# EAGLE board FinalDigitalSynthType5Multi (EAGLE 5.10)
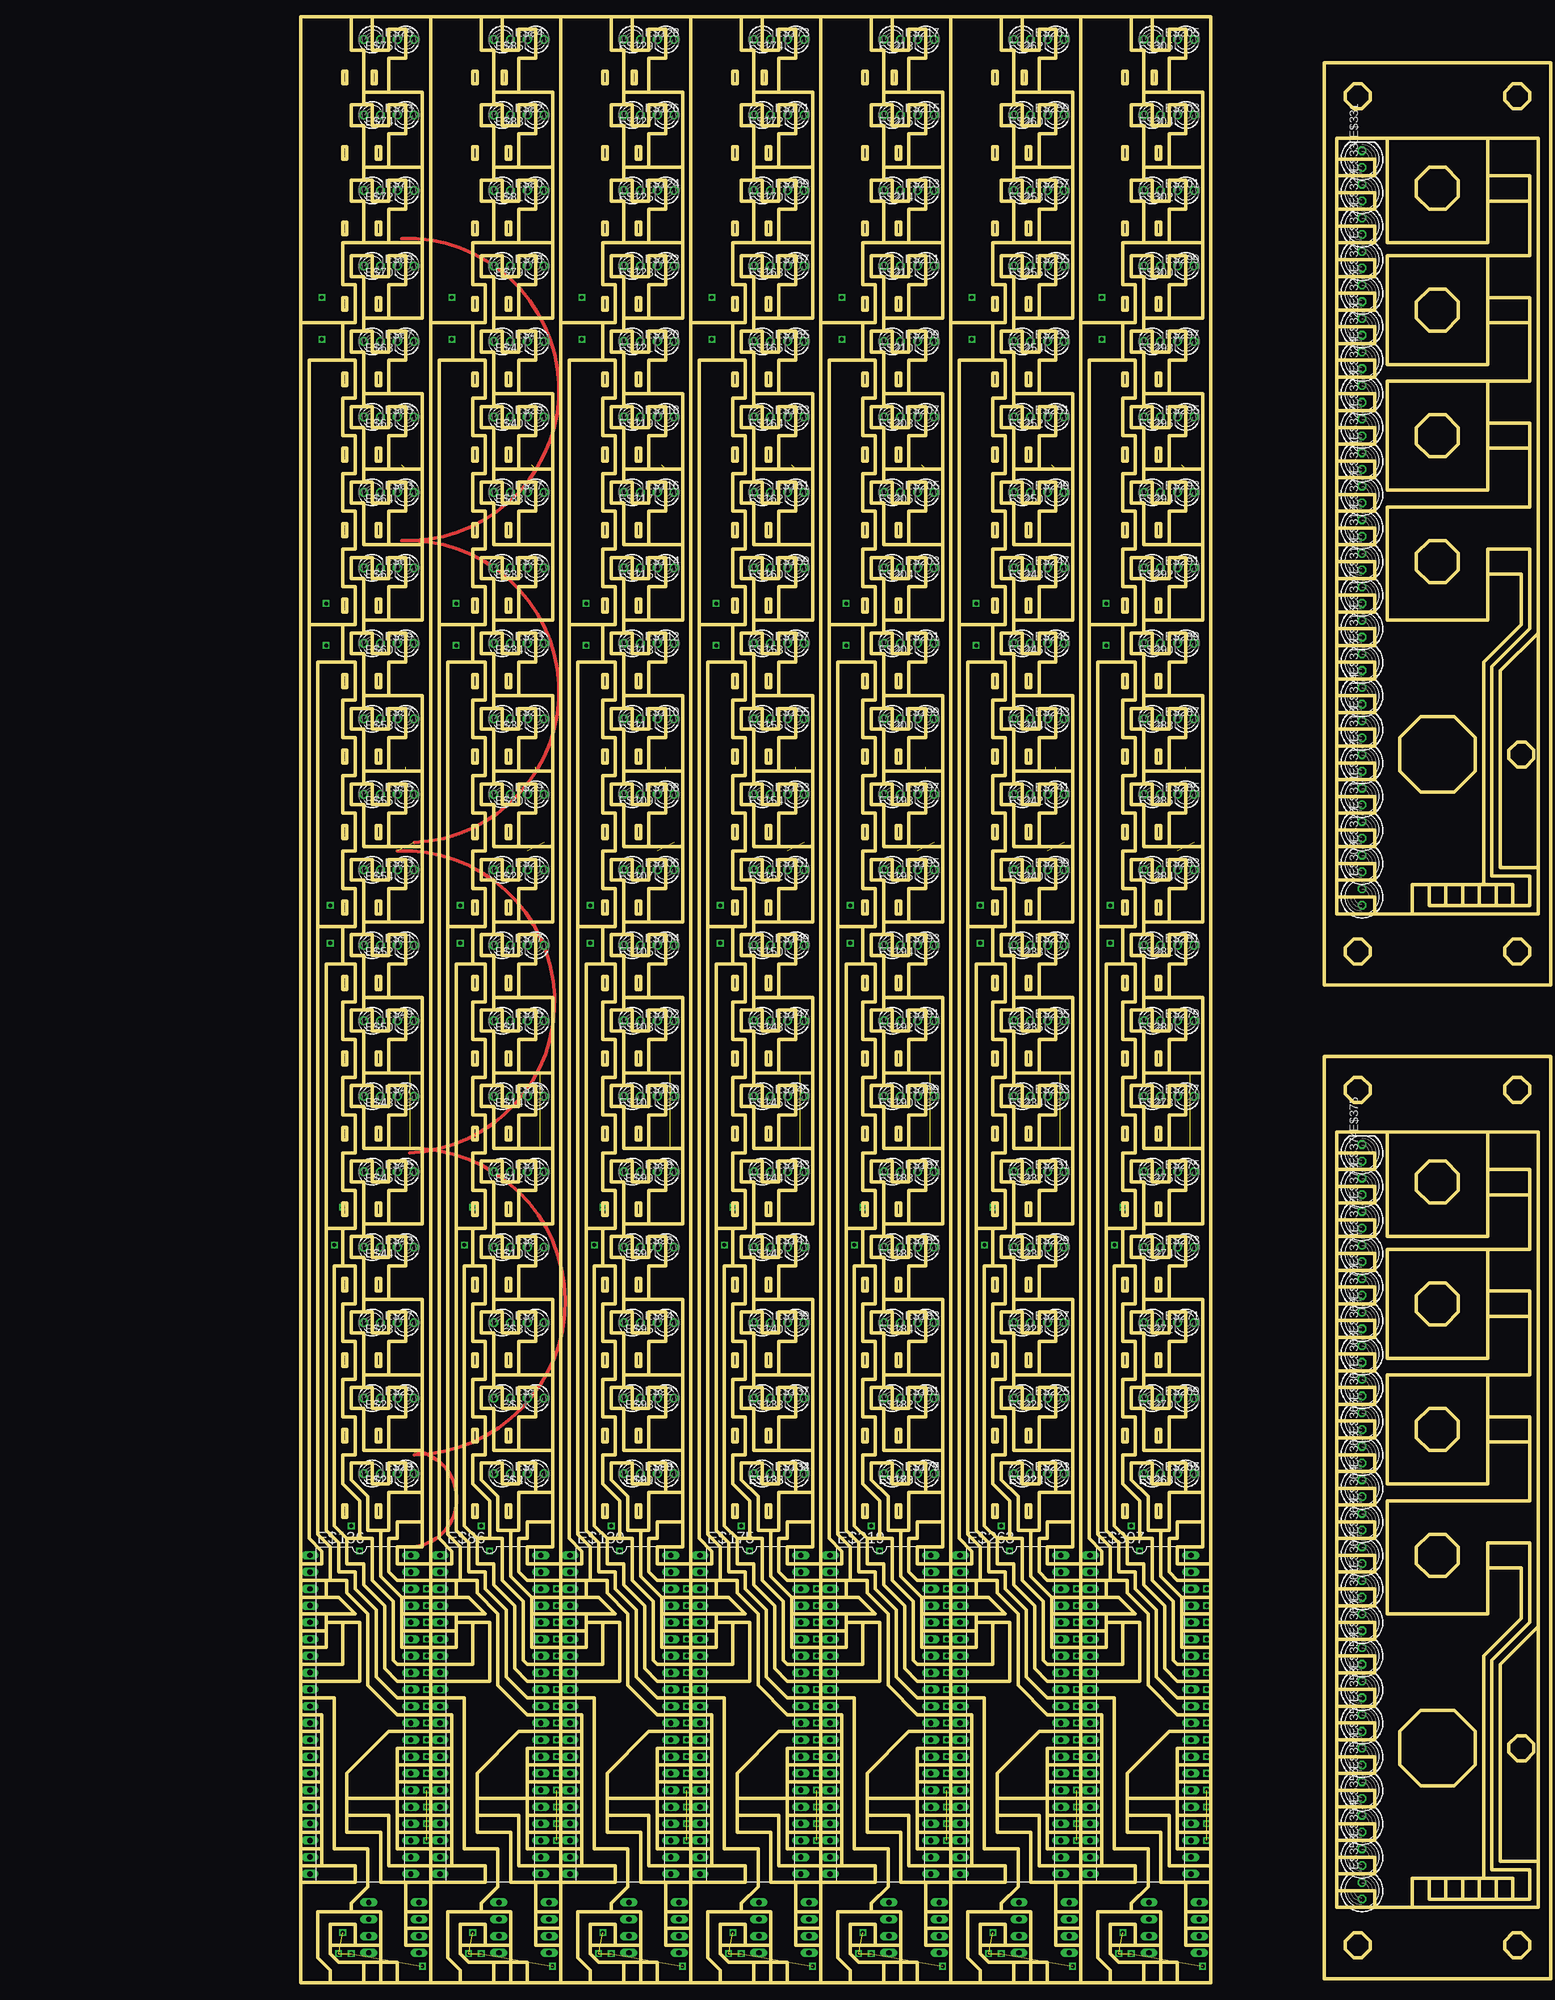
[diagram p0: board, top side]
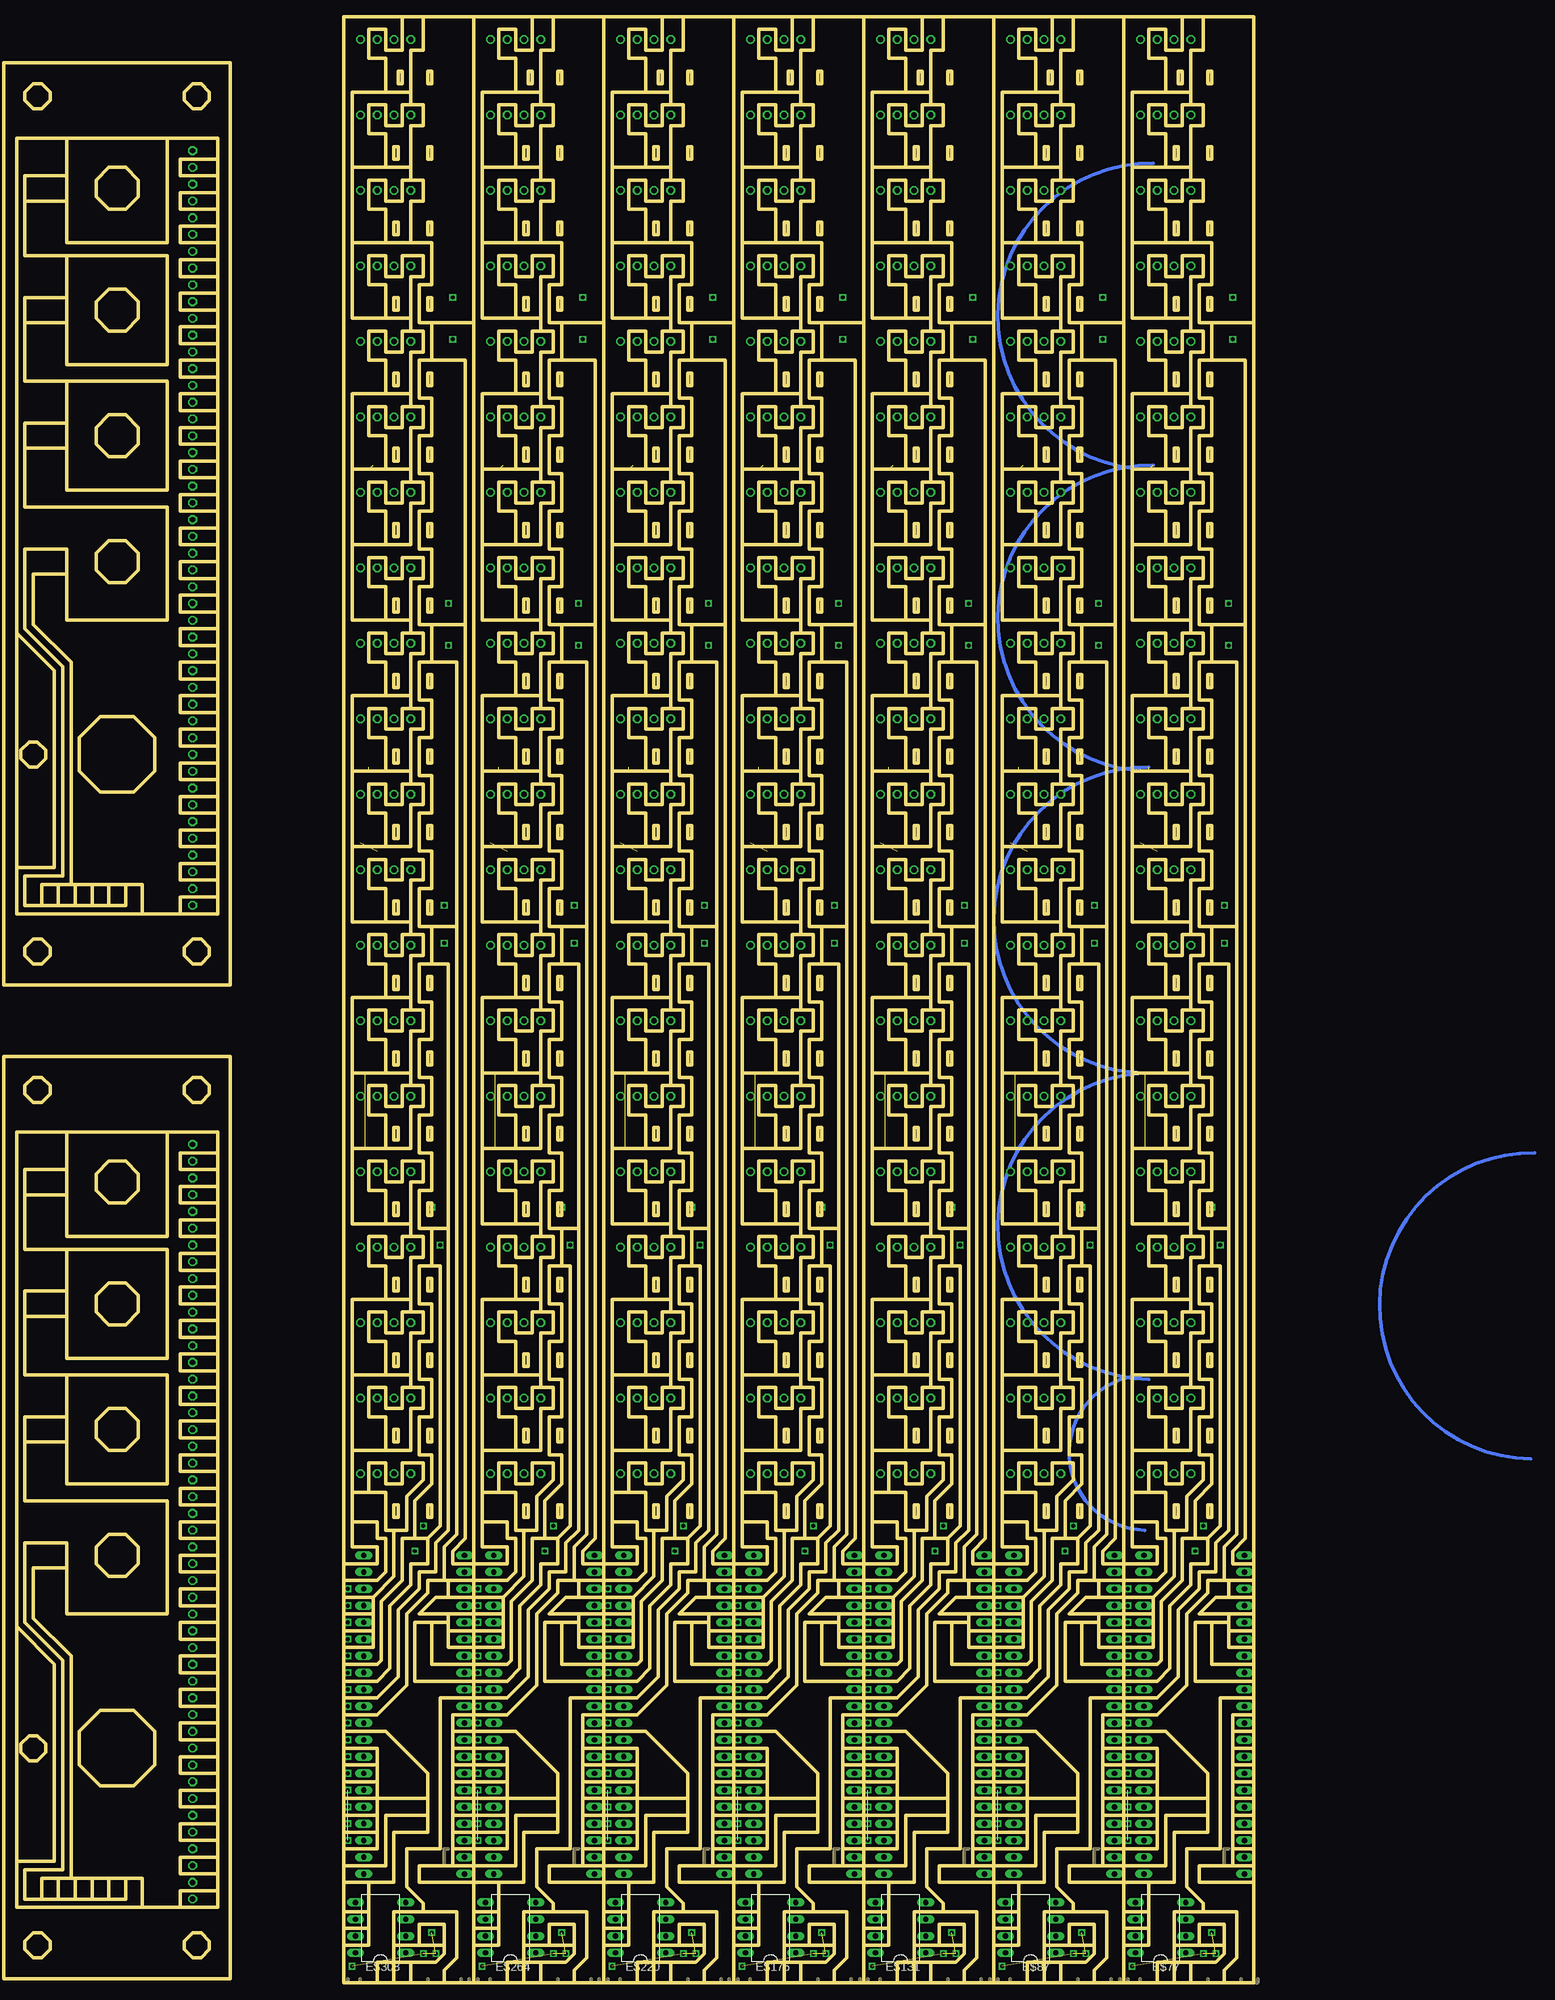
[diagram p1: board, bottom side, seen from below]

Size 187.33 x 297.81 mm. Coordinates in mm from the lower left corner, seen from the top.
Outline: 4317 segments
Copper layers (1*16): Top 0.035mm / dielectric 1.5mm / Bottom 0.035mm
Design rules "default": minimum track width 10mil, minimum drill 24mil, track to track 8mil, track to pad 8mil, pad to pad 8mil, via to via 8mil, smd to smd 8mil, copper to edge 40mil, drill to drill 8mil, minimum pad ring 10mil, minimum via ring 8mil, stop-mask expansion 4mil, vias tented up to drill 0mil, thermal gap 10mil
Milling: 1288 lines

## Footprints (pad centres in the part's own frame; a part is rotated, then mirrored left to right if it is on the bottom)
LED3MM = drill 0.813 octagon: A -1.27,0; K 1.27,0
DIL08 = drill 0.813 long: 1 -3.81,-3.81; 2 -1.27,-3.81; 3 1.27,-3.81; 4 3.81,-3.81; 5 3.81,3.81; 6 1.27,3.81; 7 -1.27,3.81; 8 -3.81,3.81
DIL40 = drill 0.813 long: 1 -24.13,-7.62; 2 -21.59,-7.62; 3 -19.05,-7.62; 4 -16.51,-7.62; 5 -13.97,-7.62; 6 -11.43,-7.62; 7 -8.89,-7.62; 8 -6.35,-7.62; 9 -3.81,-7.62; 10 -1.27,-7.62; 11 1.27,-7.62; 12 3.81,-7.62; 13 6.35,-7.62; 14 8.89,-7.62; 15 11.43,-7.62; 16 13.97,-7.62; 17 16.51,-7.62; 18 19.05,-7.62; 19 21.59,-7.62; 20 24.13,-7.62; 21 24.13,7.62; 22 21.59,7.62; 23 19.05,7.62; 24 16.51,7.62; 25 13.97,7.62; 26 11.43,7.62; 27 8.89,7.62; 28 6.35,7.62; 29 3.81,7.62; 30 1.27,7.62; 31 -1.27,7.62; 32 -3.81,7.62; 33 -6.35,7.62; 34 -8.89,7.62; 35 -11.43,7.62; 36 -13.97,7.62; 37 -16.51,7.62; 38 -19.05,7.62; 39 -21.59,7.62; 40 -24.13,7.62
LED5MM = drill 0.813 octagon: A -1.27,0; K 1.27,0

## Placement (x,y rotation side)
E$1  [LED3MM]  30.48,77.15 0 top
E$2  [LED3MM]  35.56,77.15 180 top
E$3  [LED3MM]  30.48,77.15 0 top
E$4  [LED3MM]  35.56,77.15 180 top
E$5  [LED3MM]  30.48,88.58 0 top
E$6  [LED3MM]  35.56,88.58 180 top
E$7  [LED3MM]  30.48,100.01 0 top
E$8  [LED3MM]  35.56,100.01 180 top
E$9  [LED3MM]  30.48,111.44 0 top
E$10  [LED3MM]  35.56,111.44 180 top
E$11  [LED3MM]  30.48,122.87 0 top
E$12  [LED3MM]  35.56,122.87 180 top
E$13  [LED3MM]  30.48,134.3 0 top
E$14  [LED3MM]  35.56,134.3 180 top
E$15  [LED3MM]  30.48,145.73 0 top
E$16  [LED3MM]  35.56,145.73 180 top
E$17  [LED3MM]  30.48,157.16 0 top
E$18  [LED3MM]  35.56,157.16 180 top
E$19  [LED3MM]  10.79,77.15 0 top
E$20  [LED3MM]  15.88,77.15 180 top
E$21  [LED3MM]  30.48,168.59 0 top
E$22  [LED3MM]  35.56,168.59 180 top
E$23  [LED3MM]  10.79,77.15 0 top
E$24  [LED3MM]  15.88,77.15 180 top
E$25  [LED3MM]  10.79,88.58 0 top
E$26  [LED3MM]  15.88,88.58 180 top
E$27  [LED3MM]  10.79,100.01 0 top
E$28  [LED3MM]  15.88,100.01 180 top
E$29  [LED3MM]  30.48,180.02 0 top
E$30  [LED3MM]  35.56,180.02 180 top
E$31  [LED3MM]  30.48,191.45 0 top
E$32  [LED3MM]  35.56,191.45 180 top
E$33  [LED3MM]  30.48,202.88 0 top
E$34  [LED3MM]  35.56,202.88 180 top
E$35  [LED3MM]  30.48,214.31 0 top
E$36  [LED3MM]  35.56,214.31 180 top
E$37  [LED3MM]  30.48,225.74 0 top
E$38  [LED3MM]  35.56,225.74 180 top
E$39  [LED3MM]  30.48,237.17 0 top
E$40  [LED3MM]  35.56,237.17 180 top
E$41  [LED3MM]  30.48,248.6 0 top
E$42  [LED3MM]  35.56,248.6 180 top
E$43  [LED3MM]  10.79,111.44 0 top
E$44  [LED3MM]  15.88,111.44 180 top
E$45  [LED3MM]  10.79,122.87 0 top
E$46  [LED3MM]  15.88,122.87 180 top
E$47  [LED3MM]  10.79,134.3 0 top
E$48  [LED3MM]  15.88,134.3 180 top
E$49  [LED3MM]  10.79,145.73 0 top
E$50  [LED3MM]  15.88,145.73 180 top
E$51  [LED3MM]  10.79,157.16 0 top
E$52  [LED3MM]  15.88,157.16 180 top
E$53  [LED3MM]  10.79,168.59 0 top
E$54  [LED3MM]  15.88,168.59 180 top
E$55  [LED3MM]  10.79,180.02 0 top
E$56  [LED3MM]  15.88,180.02 180 top
E$57  [LED3MM]  10.79,191.45 0 top
E$58  [LED3MM]  15.88,191.45 180 top
E$59  [LED3MM]  10.79,202.88 0 top
E$60  [LED3MM]  15.88,202.88 180 top
E$61  [LED3MM]  10.79,214.31 0 top
E$62  [LED3MM]  15.88,214.31 180 top
E$63  [LED3MM]  10.79,225.74 0 top
E$64  [LED3MM]  15.88,225.74 180 top
E$65  [LED3MM]  10.79,237.17 0 top
E$66  [LED3MM]  15.88,237.17 180 top
E$67  [LED3MM]  10.79,248.6 0 top
E$68  [LED3MM]  15.88,248.6 180 top
E$69  [LED3MM]  10.79,260.03 0 top
E$70  [LED3MM]  15.88,260.03 180 top
E$71  [LED3MM]  10.79,271.46 0 top
E$72  [LED3MM]  15.88,271.46 180 top
E$73  [LED3MM]  10.79,282.89 0 top
E$74  [LED3MM]  15.88,282.89 180 top
E$75  [LED3MM]  10.79,294.32 0 top
E$76  [LED3MM]  15.88,294.32 180 top
E$77  [DIL08]  14.1,8.38 90 bottom
E$78  [LED3MM]  30.48,260.03 0 top
E$79  [LED3MM]  35.56,260.03 180 top
E$80  [LED3MM]  30.48,271.46 0 top
E$81  [LED3MM]  35.56,271.46 180 top
E$82  [LED3MM]  30.48,282.89 0 top
E$83  [LED3MM]  35.56,282.89 180 top
E$84  [LED3MM]  30.48,294.32 0 top
E$85  [LED3MM]  35.56,294.32 180 top
E$86  [DIL40]  28.7,40.64 270 top
E$87  [DIL08]  33.78,8.38 90 bottom
E$88  [LED3MM]  50.16,77.15 0 top
E$89  [LED3MM]  55.25,77.15 180 top
E$90  [LED3MM]  50.16,77.15 0 top
E$91  [LED3MM]  55.25,77.15 180 top
E$92  [LED3MM]  50.16,88.58 0 top
E$93  [LED3MM]  55.25,88.58 180 top
E$94  [LED3MM]  50.16,100.01 0 top
E$95  [LED3MM]  55.25,100.01 180 top
E$96  [LED3MM]  50.16,111.44 0 top
E$97  [LED3MM]  55.25,111.44 180 top
E$98  [LED3MM]  50.16,122.87 0 top
E$99  [LED3MM]  55.25,122.87 180 top
E$100  [LED3MM]  50.16,134.3 0 top
E$101  [LED3MM]  55.25,134.3 180 top
E$102  [LED3MM]  50.16,145.73 0 top
E$103  [LED3MM]  55.25,145.73 180 top
E$104  [LED3MM]  50.16,157.16 0 top
E$105  [LED3MM]  55.25,157.16 180 top
E$106  [LED3MM]  50.16,168.59 0 top
E$107  [LED3MM]  55.25,168.59 180 top
E$108  [LED3MM]  50.16,180.02 0 top
E$109  [LED3MM]  55.25,180.02 180 top
E$110  [LED3MM]  50.16,191.45 0 top
E$111  [LED3MM]  55.25,191.45 180 top
E$112  [LED3MM]  50.16,202.88 0 top
E$113  [LED3MM]  55.25,202.88 180 top
E$114  [LED3MM]  50.16,214.31 0 top
E$115  [LED3MM]  55.25,214.31 180 top
E$116  [LED3MM]  50.16,225.74 0 top
E$117  [LED3MM]  55.25,225.74 180 top
E$118  [LED3MM]  50.16,237.17 0 top
E$119  [LED3MM]  55.25,237.17 180 top
E$120  [LED3MM]  50.16,248.6 0 top
E$121  [LED3MM]  55.25,248.6 180 top
E$122  [LED3MM]  50.16,260.03 0 top
E$123  [LED3MM]  55.25,260.03 180 top
E$124  [LED3MM]  50.16,271.46 0 top
E$125  [LED3MM]  55.25,271.46 180 top
E$126  [LED3MM]  50.16,282.89 0 top
E$127  [LED3MM]  55.25,282.89 180 top
E$128  [LED3MM]  50.16,294.32 0 top
E$129  [LED3MM]  55.25,294.32 180 top
E$130  [DIL40]  48.39,40.64 270 top
E$131  [DIL08]  53.47,8.38 90 bottom
E$132  [LED3MM]  69.85,77.15 0 top
E$133  [LED3MM]  74.93,77.15 180 top
E$134  [LED3MM]  69.85,77.15 0 top
E$135  [LED3MM]  74.93,77.15 180 top
E$136  [DIL40]  9.02,40.64 270 top
E$137  [LED3MM]  69.85,88.58 0 top
E$138  [LED3MM]  74.93,88.58 180 top
E$139  [LED3MM]  69.85,100.01 0 top
E$140  [LED3MM]  74.93,100.01 180 top
E$141  [LED3MM]  69.85,111.44 0 top
E$142  [LED3MM]  74.93,111.44 180 top
E$143  [LED3MM]  69.85,122.87 0 top
E$144  [LED3MM]  74.93,122.87 180 top
E$145  [LED3MM]  69.85,134.3 0 top
E$146  [LED3MM]  74.93,134.3 180 top
E$147  [LED3MM]  69.85,145.73 0 top
E$148  [LED3MM]  74.93,145.73 180 top
E$149  [LED3MM]  69.85,157.16 0 top
E$150  [LED3MM]  74.93,157.16 180 top
E$151  [LED3MM]  69.85,168.59 0 top
E$152  [LED3MM]  74.93,168.59 180 top
E$153  [LED3MM]  69.85,180.02 0 top
E$154  [LED3MM]  74.93,180.02 180 top
E$155  [LED3MM]  69.85,191.45 0 top
E$156  [LED3MM]  74.93,191.45 180 top
E$157  [LED3MM]  69.85,202.88 0 top
E$158  [LED3MM]  74.93,202.88 180 top
E$159  [LED3MM]  69.85,214.31 0 top
E$160  [LED3MM]  74.93,214.31 180 top
E$161  [LED3MM]  69.85,225.74 0 top
E$162  [LED3MM]  74.93,225.74 180 top
E$163  [LED3MM]  69.85,237.17 0 top
E$164  [LED3MM]  74.93,237.17 180 top
E$165  [LED3MM]  69.85,248.6 0 top
E$166  [LED3MM]  74.93,248.6 180 top
E$167  [LED3MM]  69.85,260.03 0 top
E$168  [LED3MM]  74.93,260.03 180 top
E$169  [LED3MM]  69.85,271.46 0 top
E$170  [LED3MM]  74.93,271.46 180 top
E$171  [LED3MM]  69.85,282.89 0 top
E$172  [LED3MM]  74.93,282.89 180 top
E$173  [LED3MM]  69.85,294.32 0 top
E$174  [LED3MM]  74.93,294.32 180 top
E$175  [DIL40]  68.07,40.64 270 top
E$176  [DIL08]  73.15,8.38 90 bottom
E$177  [LED3MM]  89.53,77.15 0 top
E$178  [LED3MM]  94.61,77.15 180 top
E$179  [LED3MM]  89.53,77.15 0 top
E$180  [LED3MM]  94.61,77.15 180 top
E$181  [LED3MM]  89.53,88.58 0 top
E$182  [LED3MM]  94.61,88.58 180 top
E$183  [LED3MM]  89.53,100.01 0 top
E$184  [LED3MM]  94.61,100.01 180 top
E$185  [LED3MM]  89.53,111.44 0 top
E$186  [LED3MM]  94.61,111.44 180 top
E$187  [LED3MM]  89.53,122.87 0 top
E$188  [LED3MM]  94.61,122.87 180 top
E$189  [LED3MM]  89.53,134.3 0 top
E$190  [LED3MM]  94.61,134.3 180 top
E$191  [LED3MM]  89.53,145.73 0 top
E$192  [LED3MM]  94.61,145.73 180 top
E$193  [LED3MM]  89.53,157.16 0 top
E$194  [LED3MM]  94.61,157.16 180 top
E$195  [LED3MM]  89.53,168.59 0 top
E$196  [LED3MM]  94.61,168.59 180 top
E$197  [LED3MM]  89.53,180.02 0 top
E$198  [LED3MM]  94.61,180.02 180 top
E$199  [LED3MM]  89.53,191.45 0 top
E$200  [LED3MM]  94.61,191.45 180 top
E$201  [LED3MM]  89.53,202.88 0 top
E$202  [LED3MM]  94.61,202.88 180 top
E$203  [LED3MM]  89.53,214.31 0 top
E$204  [LED3MM]  94.61,214.31 180 top
E$205  [LED3MM]  89.53,225.74 0 top
E$206  [LED3MM]  94.61,225.74 180 top
E$207  [LED3MM]  89.53,237.17 0 top
E$208  [LED3MM]  94.61,237.17 180 top
E$209  [LED3MM]  89.53,248.6 0 top
E$210  [LED3MM]  94.61,248.6 180 top
E$211  [LED3MM]  89.53,260.03 0 top
E$212  [LED3MM]  94.61,260.03 180 top
E$213  [LED3MM]  89.53,271.46 0 top
E$214  [LED3MM]  94.61,271.46 180 top
E$215  [LED3MM]  89.53,282.89 0 top
E$216  [LED3MM]  94.61,282.89 180 top
E$217  [LED3MM]  89.53,294.32 0 top
E$218  [LED3MM]  94.61,294.32 180 top
E$219  [DIL40]  87.76,40.64 270 top
E$220  [DIL08]  92.84,8.38 90 bottom
E$221  [LED3MM]  109.22,77.15 0 top
E$222  [LED3MM]  114.3,77.15 180 top
E$223  [LED3MM]  109.22,77.15 0 top
E$224  [LED3MM]  114.3,77.15 180 top
E$225  [LED3MM]  109.22,88.58 0 top
E$226  [LED3MM]  114.3,88.58 180 top
E$227  [LED3MM]  109.22,100.01 0 top
E$228  [LED3MM]  114.3,100.01 180 top
E$229  [LED3MM]  109.22,111.44 0 top
E$230  [LED3MM]  114.3,111.44 180 top
E$231  [LED3MM]  109.22,122.87 0 top
E$232  [LED3MM]  114.3,122.87 180 top
E$233  [LED3MM]  109.22,134.3 0 top
E$234  [LED3MM]  114.3,134.3 180 top
E$235  [LED3MM]  109.22,145.73 0 top
E$236  [LED3MM]  114.3,145.73 180 top
E$237  [LED3MM]  109.22,157.16 0 top
E$238  [LED3MM]  114.3,157.16 180 top
E$239  [LED3MM]  109.22,168.59 0 top
E$240  [LED3MM]  114.3,168.59 180 top
E$241  [LED3MM]  109.22,180.02 0 top
E$242  [LED3MM]  114.3,180.02 180 top
E$243  [LED3MM]  109.22,191.45 0 top
E$244  [LED3MM]  114.3,191.45 180 top
E$245  [LED3MM]  109.22,202.88 0 top
E$246  [LED3MM]  114.3,202.88 180 top
E$247  [LED3MM]  109.22,214.31 0 top
E$248  [LED3MM]  114.3,214.31 180 top
E$249  [LED3MM]  109.22,225.74 0 top
E$250  [LED3MM]  114.3,225.74 180 top
E$251  [LED3MM]  109.22,237.17 0 top
E$252  [LED3MM]  114.3,237.17 180 top
E$253  [LED3MM]  109.22,248.6 0 top
E$254  [LED3MM]  114.3,248.6 180 top
E$255  [LED3MM]  109.22,260.03 0 top
E$256  [LED3MM]  114.3,260.03 180 top
E$257  [LED3MM]  109.22,271.46 0 top
E$258  [LED3MM]  114.3,271.46 180 top
E$259  [LED3MM]  109.22,282.89 0 top
E$260  [LED3MM]  114.3,282.89 180 top
E$261  [LED3MM]  109.22,294.32 0 top
E$262  [LED3MM]  114.3,294.32 180 top
E$263  [DIL40]  107.44,40.64 270 top
E$264  [DIL08]  112.52,8.38 90 bottom
E$265  [LED3MM]  128.91,77.15 0 top
E$266  [LED3MM]  133.99,77.15 180 top
E$267  [LED3MM]  128.91,77.15 0 top
E$268  [LED3MM]  133.99,77.15 180 top
E$269  [LED3MM]  128.91,88.58 0 top
E$270  [LED3MM]  133.99,88.58 180 top
E$271  [LED3MM]  128.91,100.01 0 top
E$272  [LED3MM]  133.99,100.01 180 top
E$273  [LED3MM]  128.91,111.44 0 top
E$274  [LED3MM]  133.99,111.44 180 top
E$275  [LED3MM]  128.91,122.87 0 top
E$276  [LED3MM]  133.99,122.87 180 top
E$277  [LED3MM]  128.91,134.3 0 top
E$278  [LED3MM]  133.99,134.3 180 top
E$279  [LED3MM]  128.91,145.73 0 top
E$280  [LED3MM]  133.99,145.73 180 top
E$281  [LED3MM]  128.91,157.16 0 top
E$282  [LED3MM]  133.99,157.16 180 top
E$283  [LED3MM]  128.91,168.59 0 top
E$284  [LED3MM]  133.99,168.59 180 top
E$285  [LED3MM]  128.91,180.02 0 top
E$286  [LED3MM]  133.99,180.02 180 top
E$287  [LED3MM]  128.91,191.45 0 top
E$288  [LED3MM]  133.99,191.45 180 top
E$289  [LED3MM]  128.91,202.88 0 top
E$290  [LED3MM]  133.99,202.88 180 top
E$291  [LED3MM]  128.91,214.31 0 top
E$292  [LED3MM]  133.99,214.31 180 top
E$293  [LED3MM]  128.91,225.74 0 top
E$294  [LED3MM]  133.99,225.74 180 top
E$295  [LED3MM]  128.91,237.17 0 top
E$296  [LED3MM]  133.99,237.17 180 top
E$297  [LED3MM]  128.91,248.6 0 top
E$298  [LED3MM]  133.99,248.6 180 top
E$299  [LED3MM]  128.91,260.03 0 top
E$300  [LED3MM]  133.99,260.03 180 top
E$301  [LED3MM]  128.91,271.46 0 top
E$302  [LED3MM]  133.99,271.46 180 top
E$303  [LED3MM]  128.91,282.89 0 top
E$304  [LED3MM]  133.99,282.89 180 top
E$305  [LED3MM]  128.91,294.32 0 top
E$306  [LED3MM]  133.99,294.32 180 top
E$307  [DIL40]  127.13,40.64 270 top
E$308  [DIL08]  132.21,8.38 90 bottom
E$309  [LED5MM]  160.66,164.47 90 top
E$310  [LED5MM]  160.66,169.55 90 top
E$311  [LED5MM]  160.66,174.62 90 top
E$312  [LED5MM]  160.66,179.71 90 top
E$313  [LED5MM]  160.66,184.78 90 top
E$314  [LED5MM]  160.66,189.87 90 top
E$315  [LED5MM]  160.66,194.95 90 top
E$316  [LED5MM]  160.66,200.03 90 top
E$317  [LED5MM]  160.66,205.11 90 top
E$318  [LED5MM]  160.66,210.19 90 top
E$319  [LED5MM]  160.66,215.27 90 top
E$320  [LED5MM]  160.66,220.34 90 top
E$321  [LED5MM]  160.66,225.43 90 top
E$322  [LED5MM]  160.66,230.5 90 top
E$323  [LED5MM]  160.66,235.59 90 top
E$324  [LED5MM]  160.66,240.67 90 top
E$325  [LED5MM]  160.66,245.75 90 top
E$326  [LED5MM]  160.66,250.83 90 top
E$327  [LED5MM]  160.66,255.91 90 top
E$328  [LED5MM]  160.66,260.99 90 top
E$329  [LED5MM]  160.66,266.06 90 top
E$330  [LED5MM]  160.66,271.14 90 top
E$331  [LED5MM]  160.66,276.23 90 top
E$353  [LED5MM]  160.66,13.97 90 top
E$354  [LED5MM]  160.66,19.05 90 top
E$355  [LED5MM]  160.66,24.13 90 top
E$356  [LED5MM]  160.66,29.21 90 top
E$357  [LED5MM]  160.66,34.29 90 top
E$358  [LED5MM]  160.66,39.37 90 top
E$359  [LED5MM]  160.66,44.45 90 top
E$360  [LED5MM]  160.66,49.53 90 top
E$361  [LED5MM]  160.66,54.61 90 top
E$362  [LED5MM]  160.66,59.69 90 top
E$363  [LED5MM]  160.66,64.77 90 top
E$364  [LED5MM]  160.66,69.85 90 top
E$365  [LED5MM]  160.66,74.93 90 top
E$366  [LED5MM]  160.66,80.01 90 top
E$367  [LED5MM]  160.66,85.09 90 top
E$368  [LED5MM]  160.66,90.17 90 top
E$369  [LED5MM]  160.66,95.25 90 top
E$370  [LED5MM]  160.66,100.33 90 top
E$371  [LED5MM]  160.66,105.41 90 top
E$372  [LED5MM]  160.66,110.49 90 top
E$373  [LED5MM]  160.66,115.57 90 top
E$374  [LED5MM]  160.66,120.65 90 top
E$375  [LED5MM]  160.66,125.73 90 top

## Library data of the parts
E$1-E$76 E$78-E$85 E$88-E$129 E$132-E$135 E$137-E$174 E$177-E$218 E$221-E$262 E$265-E$306 E$309-E$331 E$353-E$375 = led
E$77 E$87 E$131 E$176 E$220 E$264 E$308 = 40xx
E$86 E$130 E$136 E$175 E$219 E$263 E$307 = 74xx-eu

## Tracks (layer width: path | path; a pad name or v marks a point on that pad's centre or on a via)
S$1
  Top 0.508: 17.14,66.04 arc171 16.51,80.64
S$2  (4 unrouted)
  Top 0.508: 16.51,126.36 arc-180 17.14,80.01
  Bottom 0.508: 15.24,137.8 arc-180 15.88,91.44 | 15.88,184.15 arc-180 16.51,137.8 | 15.24,229.87 arc-180 15.88,183.52 | 15.24,275.59 arc-180 15.88,229.24
S$3  (1 unrouted)
  Top 0.508: 16.51,125.73 arc180 14.61,171.45 | 17.14,218.44 arc-175 17.14,172.72 | 17.14,218.44 arc5 15.24,218.44 | 15.24,264.16 arc-180 17.14,218.44
S$4
  Bottom 0.508: 16.51,68.58 arc180 15.88,92.07
S$5  (via drill 0.6)  (3 unrouted)
  other vias: 6.35,7.62 5.71,4.45 18.41,2.54 7.62,4.45
S$6  (via drill 0.6)
  other vias: 19.05,59.69
S$7  (via drill 0.6)
  other vias: 19.05,57.15
S$8  (via drill 0.6)
  other vias: 19.05,54.61
S$9  (via drill 0.6)
  other vias: 19.05,52.07
S$10  (via drill 0.6)
  other vias: 19.05,49.53
S$11  (via drill 0.6)
  other vias: 19.05,46.99
S$12  (via drill 0.6)
  other vias: 19.05,44.45
S$13  (via drill 0.6)
  other vias: 19.05,41.91
S$14  (via drill 0.6)
  other vias: 19.05,39.37
S$15  (via drill 0.6)
  other vias: 19.05,36.83
S$16  (via drill 0.6)
  other vias: 19.05,34.29
S$17  (via drill 0.6)
  other vias: 19.05,31.75
S$18  (via drill 0.6)  (3 unrouted)
  other vias: 19.05,29.21 19.05,26.67 19.05,24.13 19.05,21.59
S$19  (via drill 0.6)
  other vias: 3.17,248.92
S$20  (via drill 0.6)
  other vias: 3.17,255.27
S$21  (via drill 0.6)
  other vias: 3.81,202.56
S$22  (via drill 0.6)
  other vias: 3.81,208.92
S$23  (via drill 0.6)
  other vias: 4.45,157.48
S$24  (via drill 0.6)
  other vias: 4.45,163.2
S$25  (via drill 0.6)
  other vias: 5.08,111.76
S$26  (via drill 0.6)
  other vias: 6.35,117.47
S$27  (via drill 0.6)
  other vias: 8.89,65.41
S$28  (via drill 0.6)
  other vias: 7.62,69.21
S$29  (1 unrouted)
S$30  (via drill 0.6)  (3 unrouted)
  other vias: 26.04,7.62 25.4,4.45 38.1,2.54 27.3,4.45
S$31  (via drill 0.6)
  other vias: 38.73,59.69
S$32  (via drill 0.6)
  other vias: 38.73,57.15
S$33  (via drill 0.6)
  other vias: 38.73,54.61
S$34  (via drill 0.6)
  other vias: 38.73,52.07
S$35  (via drill 0.6)
  other vias: 38.73,49.53
S$36  (via drill 0.6)
  other vias: 38.73,46.99
S$37  (via drill 0.6)
  other vias: 38.73,44.45
S$38  (via drill 0.6)
  other vias: 38.73,41.91
S$39  (via drill 0.6)
  other vias: 38.73,39.37
S$40  (via drill 0.6)
  other vias: 38.73,36.83
S$41  (via drill 0.6)
  other vias: 38.73,34.29
S$42  (via drill 0.6)
  other vias: 38.73,31.75
S$43  (via drill 0.6)  (3 unrouted)
  other vias: 38.73,29.21 38.73,26.67 38.73,24.13 38.73,21.59
S$44  (4 unrouted)
S$45  (via drill 0.6)
  other vias: 22.86,248.92
S$46  (via drill 0.6)
  other vias: 22.86,255.27
S$47  (via drill 0.6)
  other vias: 23.49,202.56
S$48  (via drill 0.6)
  other vias: 23.49,208.92
S$49  (via drill 0.6)
  other vias: 24.13,157.48
S$50  (via drill 0.6)
  other vias: 24.13,163.2
S$51  (via drill 0.6)
  other vias: 24.76,111.76
S$52  (via drill 0.6)
  other vias: 26.04,117.47
S$53  (via drill 0.6)
  other vias: 28.57,65.41
S$54  (via drill 0.6)
  other vias: 27.3,69.21
S$55  (1 unrouted)
S$56  (via drill 0.6)  (3 unrouted)
  other vias: 45.72,7.62 45.09,4.45 57.79,2.54 46.99,4.45
S$57  (via drill 0.6)
  other vias: 58.42,59.69
S$58  (via drill 0.6)
  other vias: 58.42,57.15
S$59  (via drill 0.6)
  other vias: 58.42,54.61
S$60  (via drill 0.6)
  other vias: 58.42,52.07
S$61  (via drill 0.6)
  other vias: 58.42,49.53
S$62  (via drill 0.6)
  other vias: 58.42,46.99
S$63  (via drill 0.6)
  other vias: 58.42,44.45
S$64  (via drill 0.6)
  other vias: 58.42,41.91
S$65  (via drill 0.6)
  other vias: 58.42,39.37
S$66  (via drill 0.6)
  other vias: 58.42,36.83
S$67  (via drill 0.6)
  other vias: 58.42,34.29
S$68  (via drill 0.6)
  other vias: 58.42,31.75
S$69  (via drill 0.6)  (3 unrouted)
  other vias: 58.42,29.21 58.42,26.67 58.42,24.13 58.42,21.59
S$70  (4 unrouted)
S$71  (via drill 0.6)
  other vias: 42.55,248.92
S$72  (via drill 0.6)
  other vias: 42.55,255.27
S$73  (via drill 0.6)
  other vias: 43.18,202.56
S$74  (via drill 0.6)
  other vias: 43.18,208.92
S$75  (via drill 0.6)
  other vias: 43.82,157.48
S$76  (via drill 0.6)
  other vias: 43.82,163.2
S$77  (via drill 0.6)
  other vias: 44.45,111.76
S$78  (via drill 0.6)
  other vias: 45.72,117.47
S$79  (via drill 0.6)
  other vias: 48.26,65.41
S$80  (via drill 0.6)
  other vias: 46.99,69.21
S$81  (1 unrouted)
S$82  (via drill 0.6)  (3 unrouted)
  other vias: 65.41,7.62 64.77,4.45 77.47,2.54 66.67,4.45
S$83  (via drill 0.6)
  other vias: 78.1,59.69
S$84  (via drill 0.6)
  other vias: 78.1,57.15
S$85  (via drill 0.6)
  other vias: 78.1,54.61
S$86  (via drill 0.6)
  other vias: 78.1,52.07
S$87  (via drill 0.6)
  other vias: 78.1,49.53
S$88  (via drill 0.6)
  other vias: 78.1,46.99
S$89  (via drill 0.6)
  other vias: 78.1,44.45
S$90  (via drill 0.6)
  other vias: 78.1,41.91
S$91  (via drill 0.6)
  other vias: 78.1,39.37
S$92  (via drill 0.6)
  other vias: 78.1,36.83
S$93  (via drill 0.6)
  other vias: 78.1,34.29
S$94  (via drill 0.6)
  other vias: 78.1,31.75
S$95  (via drill 0.6)  (3 unrouted)
  other vias: 78.1,29.21 78.1,26.67 78.1,24.13 78.1,21.59
S$96  (4 unrouted)
S$97  (via drill 0.6)
  other vias: 62.23,248.92
S$98  (via drill 0.6)
  other vias: 62.23,255.27
S$99  (via drill 0.6)
  other vias: 62.87,202.56
S$100  (via drill 0.6)
  other vias: 62.87,208.92
S$101  (via drill 0.6)
  other vias: 63.5,157.48
S$102  (via drill 0.6)
  other vias: 63.5,163.2
S$103
  Bottom 0.508: -41.91,79.38 arc180 -42.54,125.73
S$104  (via drill 0.6)
  other vias: 64.13,111.76
S$105  (via drill 0.6)
  other vias: 65.41,117.47
S$106  (via drill 0.6)
  other vias: 67.94,65.41
S$107  (via drill 0.6)
  other vias: 66.67,69.21
S$108  (1 unrouted)
S$109  (via drill 0.6)  (3 unrouted)
  other vias: 85.09,7.62 84.45,4.45 97.16,2.54 86.36,4.45
S$110  (via drill 0.6)
  other vias: 97.79,59.69
S$111  (via drill 0.6)
  other vias: 97.79,57.15
S$112  (via drill 0.6)
  other vias: 97.79,54.61
S$113  (via drill 0.6)
  other vias: 97.79,52.07
S$114  (via drill 0.6)
  other vias: 97.79,49.53
S$115  (via drill 0.6)
  other vias: 97.79,46.99
S$116  (via drill 0.6)
  other vias: 97.79,44.45
S$117  (via drill 0.6)
  other vias: 97.79,41.91
S$118  (via drill 0.6)
  other vias: 97.79,39.37
S$119  (via drill 0.6)
  other vias: 97.79,36.83
S$120  (via drill 0.6)
  other vias: 97.79,34.29
S$121  (via drill 0.6)
  other vias: 97.79,31.75
S$122  (via drill 0.6)  (3 unrouted)
  other vias: 97.79,29.21 97.79,26.67 97.79,24.13 97.79,21.59
S$123  (4 unrouted)
S$124  (via drill 0.6)
  other vias: 81.91,248.92
S$125  (via drill 0.6)
  other vias: 81.91,255.27
S$126  (via drill 0.6)
  other vias: 82.55,202.56
S$127  (via drill 0.6)
  other vias: 82.55,208.92
S$128  (via drill 0.6)
  other vias: 83.18,157.48
S$129  (via drill 0.6)
  other vias: 83.18,163.2
S$130  (via drill 0.6)
  other vias: 83.82,111.76
S$131  (via drill 0.6)
  other vias: 85.09,117.47
S$132  (via drill 0.6)
  other vias: 87.63,65.41
S$133  (via drill 0.6)
  other vias: 86.36,69.21
S$134  (1 unrouted)
S$135  (via drill 0.6)  (3 unrouted)
  other vias: 104.77,7.62 104.14,4.45 116.84,2.54 106.05,4.45
S$136  (via drill 0.6)
  other vias: 117.47,59.69
S$137  (via drill 0.6)
  other vias: 117.47,57.15
S$138  (via drill 0.6)
  other vias: 117.47,54.61
S$139  (via drill 0.6)
  other vias: 117.47,52.07
S$140  (via drill 0.6)
  other vias: 117.47,49.53
S$141  (via drill 0.6)
  other vias: 117.47,46.99
S$142  (via drill 0.6)
  other vias: 117.47,44.45
S$143  (via drill 0.6)
  other vias: 117.47,41.91
S$144  (via drill 0.6)
  other vias: 117.47,39.37
S$145  (via drill 0.6)
  other vias: 117.47,36.83
S$146  (via drill 0.6)
  other vias: 117.47,34.29
S$147  (via drill 0.6)
  other vias: 117.47,31.75
S$148  (via drill 0.6)  (3 unrouted)
  other vias: 117.47,29.21 117.47,26.67 117.47,24.13 117.47,21.59
S$149  (4 unrouted)
S$150  (via drill 0.6)
  other vias: 101.6,248.92
S$151  (via drill 0.6)
  other vias: 101.6,255.27
S$152  (via drill 0.6)
  other vias: 102.23,202.56
S$153  (via drill 0.6)
  other vias: 102.23,208.92
S$154  (via drill 0.6)
  other vias: 102.87,157.48
S$155  (via drill 0.6)
  other vias: 102.87,163.2
S$156  (via drill 0.6)
  other vias: 103.5,111.76
S$157  (via drill 0.6)
  other vias: 104.77,117.47
S$158  (via drill 0.6)
  other vias: 107.31,65.41
S$159  (via drill 0.6)
  other vias: 106.05,69.21
S$160  (1 unrouted)
S$161  (via drill 0.6)  (3 unrouted)
  other vias: 124.46,7.62 123.82,4.45 136.53,2.54 125.73,4.45
S$162  (via drill 0.6)
  other vias: 137.16,59.69
S$163  (via drill 0.6)
  other vias: 137.16,57.15
S$164  (via drill 0.6)
  other vias: 137.16,54.61
S$165  (via drill 0.6)
  other vias: 137.16,52.07
S$166  (via drill 0.6)
  other vias: 137.16,49.53
S$167  (via drill 0.6)
  other vias: 137.16,46.99
S$168  (via drill 0.6)
  other vias: 137.16,44.45
S$169  (via drill 0.6)
  other vias: 137.16,41.91
S$170  (via drill 0.6)
  other vias: 137.16,39.37
S$171  (via drill 0.6)
  other vias: 137.16,36.83
S$172  (via drill 0.6)
  other vias: 137.16,34.29
S$173  (via drill 0.6)
  other vias: 137.16,31.75
S$174  (via drill 0.6)  (3 unrouted)
  other vias: 137.16,29.21 137.16,26.67 137.16,24.13 137.16,21.59
S$175  (4 unrouted)
S$176  (via drill 0.6)
  other vias: 121.28,248.92
S$177  (via drill 0.6)
  other vias: 121.28,255.27
S$178  (via drill 0.6)
  other vias: 121.92,202.56
S$179  (via drill 0.6)
  other vias: 121.92,208.92
S$180  (via drill 0.6)
  other vias: 122.55,157.48
S$181  (via drill 0.6)
  other vias: 122.55,163.2
S$182  (via drill 0.6)
  other vias: 123.19,111.76
S$183  (via drill 0.6)
  other vias: 124.46,117.47
S$184  (via drill 0.6)
  other vias: 127,65.41
S$185  (via drill 0.6)
  other vias: 125.73,69.21

## Text on the board
Unrouted: Vss | 22 | 21 | Vss | 20 | 19 | 18 | 17 | 16 | 15 | 14 | 13 | 12 | 11 | 10 | 9 | 8 | 7 | 6 | 5 | 4 | 3 | 2 | * | * | * | * | * | VDD | RE2 | RE1 | RE0 | RA5 | RA4 | RA3 | 1 | Vss | 22 | 21 | Vss | 20 | 19 | 18 | 17 | 16 | 15 | 14 | 13 | 12 | 11 | VUSB | VUSB | VUSB | VUSB | VUSB | VUSB | VUSB | 10 | RC2 | RC2 | RC2 | RC2 | RC2 | RC2 | RC2 | RC1 | RC1 | RC1 | RC1 | RC1 | RC1 | RC1 | RC6 | RC6 | RC6 | RC6 | RC6 | RC6 | RC6 | 9 | RC0 | RC0 | RC0 | RC0 | RC0 | RC0 | RC0 | OSC2 | OSC2 | OSC2 | OSC2 | OSC2 | OSC2 | OSC2 | 8 | OSC1 | OSC1 | OSC1 | OSC1 | OSC1 | OSC1 | OSC1 | VSS | VSS | VSS | VSS | VSS | VSS | VSS | 7 | VDD | VDD | VDD | VDD | VDD | VDD | VDD | RE2 | RE2 | RE2 | RE2 | RE2 | RE2 | RE2 | 6 | * | * | * | * | * | * | * | RE1 | VDD | RE1 | VDD | RE1 | VDD | RE1 | VDD | RE1 | VDD | RE1 | VDD | RE1 | VDD | * | * | * | * | * | * | * | RE0 | RB0 | SCL | RE0 | RB0 | SCL | RE0 | RB0 | SCL | RE0 | RB0 | SCL | RE0 | RB0 | SCL | RE0 | RB0 | SCL | RE0 | RB0 | SCL | * | * | * | * | * | * | * | * | * | * | * | * | * | * | 5 | RA5 | RB1 | RA5 | RB1 | RA5 | RB1 | RA5 | RB1 | RA5 | RB1 | RA5 | RB1 | RA5 | RB1 | * | * | * | * | * | * | * | * | * | * | * | * | * | * | RA4 | RB2 | RA4 | RB2 | RA4 | RB2 | RA4 | RB2 | RA4 | RB2 | RA4 | RB2 | RA4 | RB2 | 4 | * | * | * | * | * | * | * | RA3 | RB3 | RA3 | RB3 | RA3 | RB3 | RA3 | RB3 | RA3 | RB3 | RA3 | RB3 | RA3 | RB3 | * | * | * | * | * | * | * | * | * | * | * | * | * | * | RA2 | RB4 | RA2 | RB4 | RA2 | RB4 | RA2 | RB4 | RA2 | RB4 | RA2 | RB4 | RA2 | RB4 | * | * | * | * | * | * | * | * | * | * | * | * | * | * | 3 | RA1 | RB5 | RA1 | RB5 | RA1 | RB5 | RA1 | RB5 | RA1 | RB5 | RA1 | RB5 | RA1 | RB5 | * | * | * | * | * | * | * | RA0 | PGC | RA0 | PGC | RA0 | PGC | RA0 | PGC | RA0 | PGC | RA0 | PGC | RA0 | PGC | * | * | * | * | * | * | * | 2 | MCLR | PGD | MCLR | PGD | MCLR | PGD | MCLR | PGD | MCLR | PGD | MCLR | PGD | MCLR | PGD | * | * | * | * | * | VDD | RE2 | RE1 | RE0 | RA5 | RA4 | RA3 | 1 | V+ | outA | V+ | outA | V+ | outA | V+ | outA | V+ | outA | V+ | outA | V+ | outA | OUTB | INA- | OUTB | INA- | OUTB | INA- | OUTB | INA- | OUTB | INA- | OUTB | INA- | OUTB | INA- | INB- | INB- | INB- | INB- | INB- | INB- | INB- | INA+ | INA+ | INA+ | INA+ | INA+ | INA+ | INA+ | INB+ | V- | INB+ | V- | INB+ | V- | INB+ | V- | INB+ | V- | INB+ | V- | INB+ | V-